# Altium PCB msp430_v4.2_name.PcbDoc (part 1 of 2)
Units mil, origin at the board's own origin, x right, y up, seen from the top; angles counter-clockwise.
Board outline 6102.36 x 4921.26 mil, 2 copper layers (Top Layer, Bottom Layer); 157 components, 141 nets, 553 pads, 72 vias.
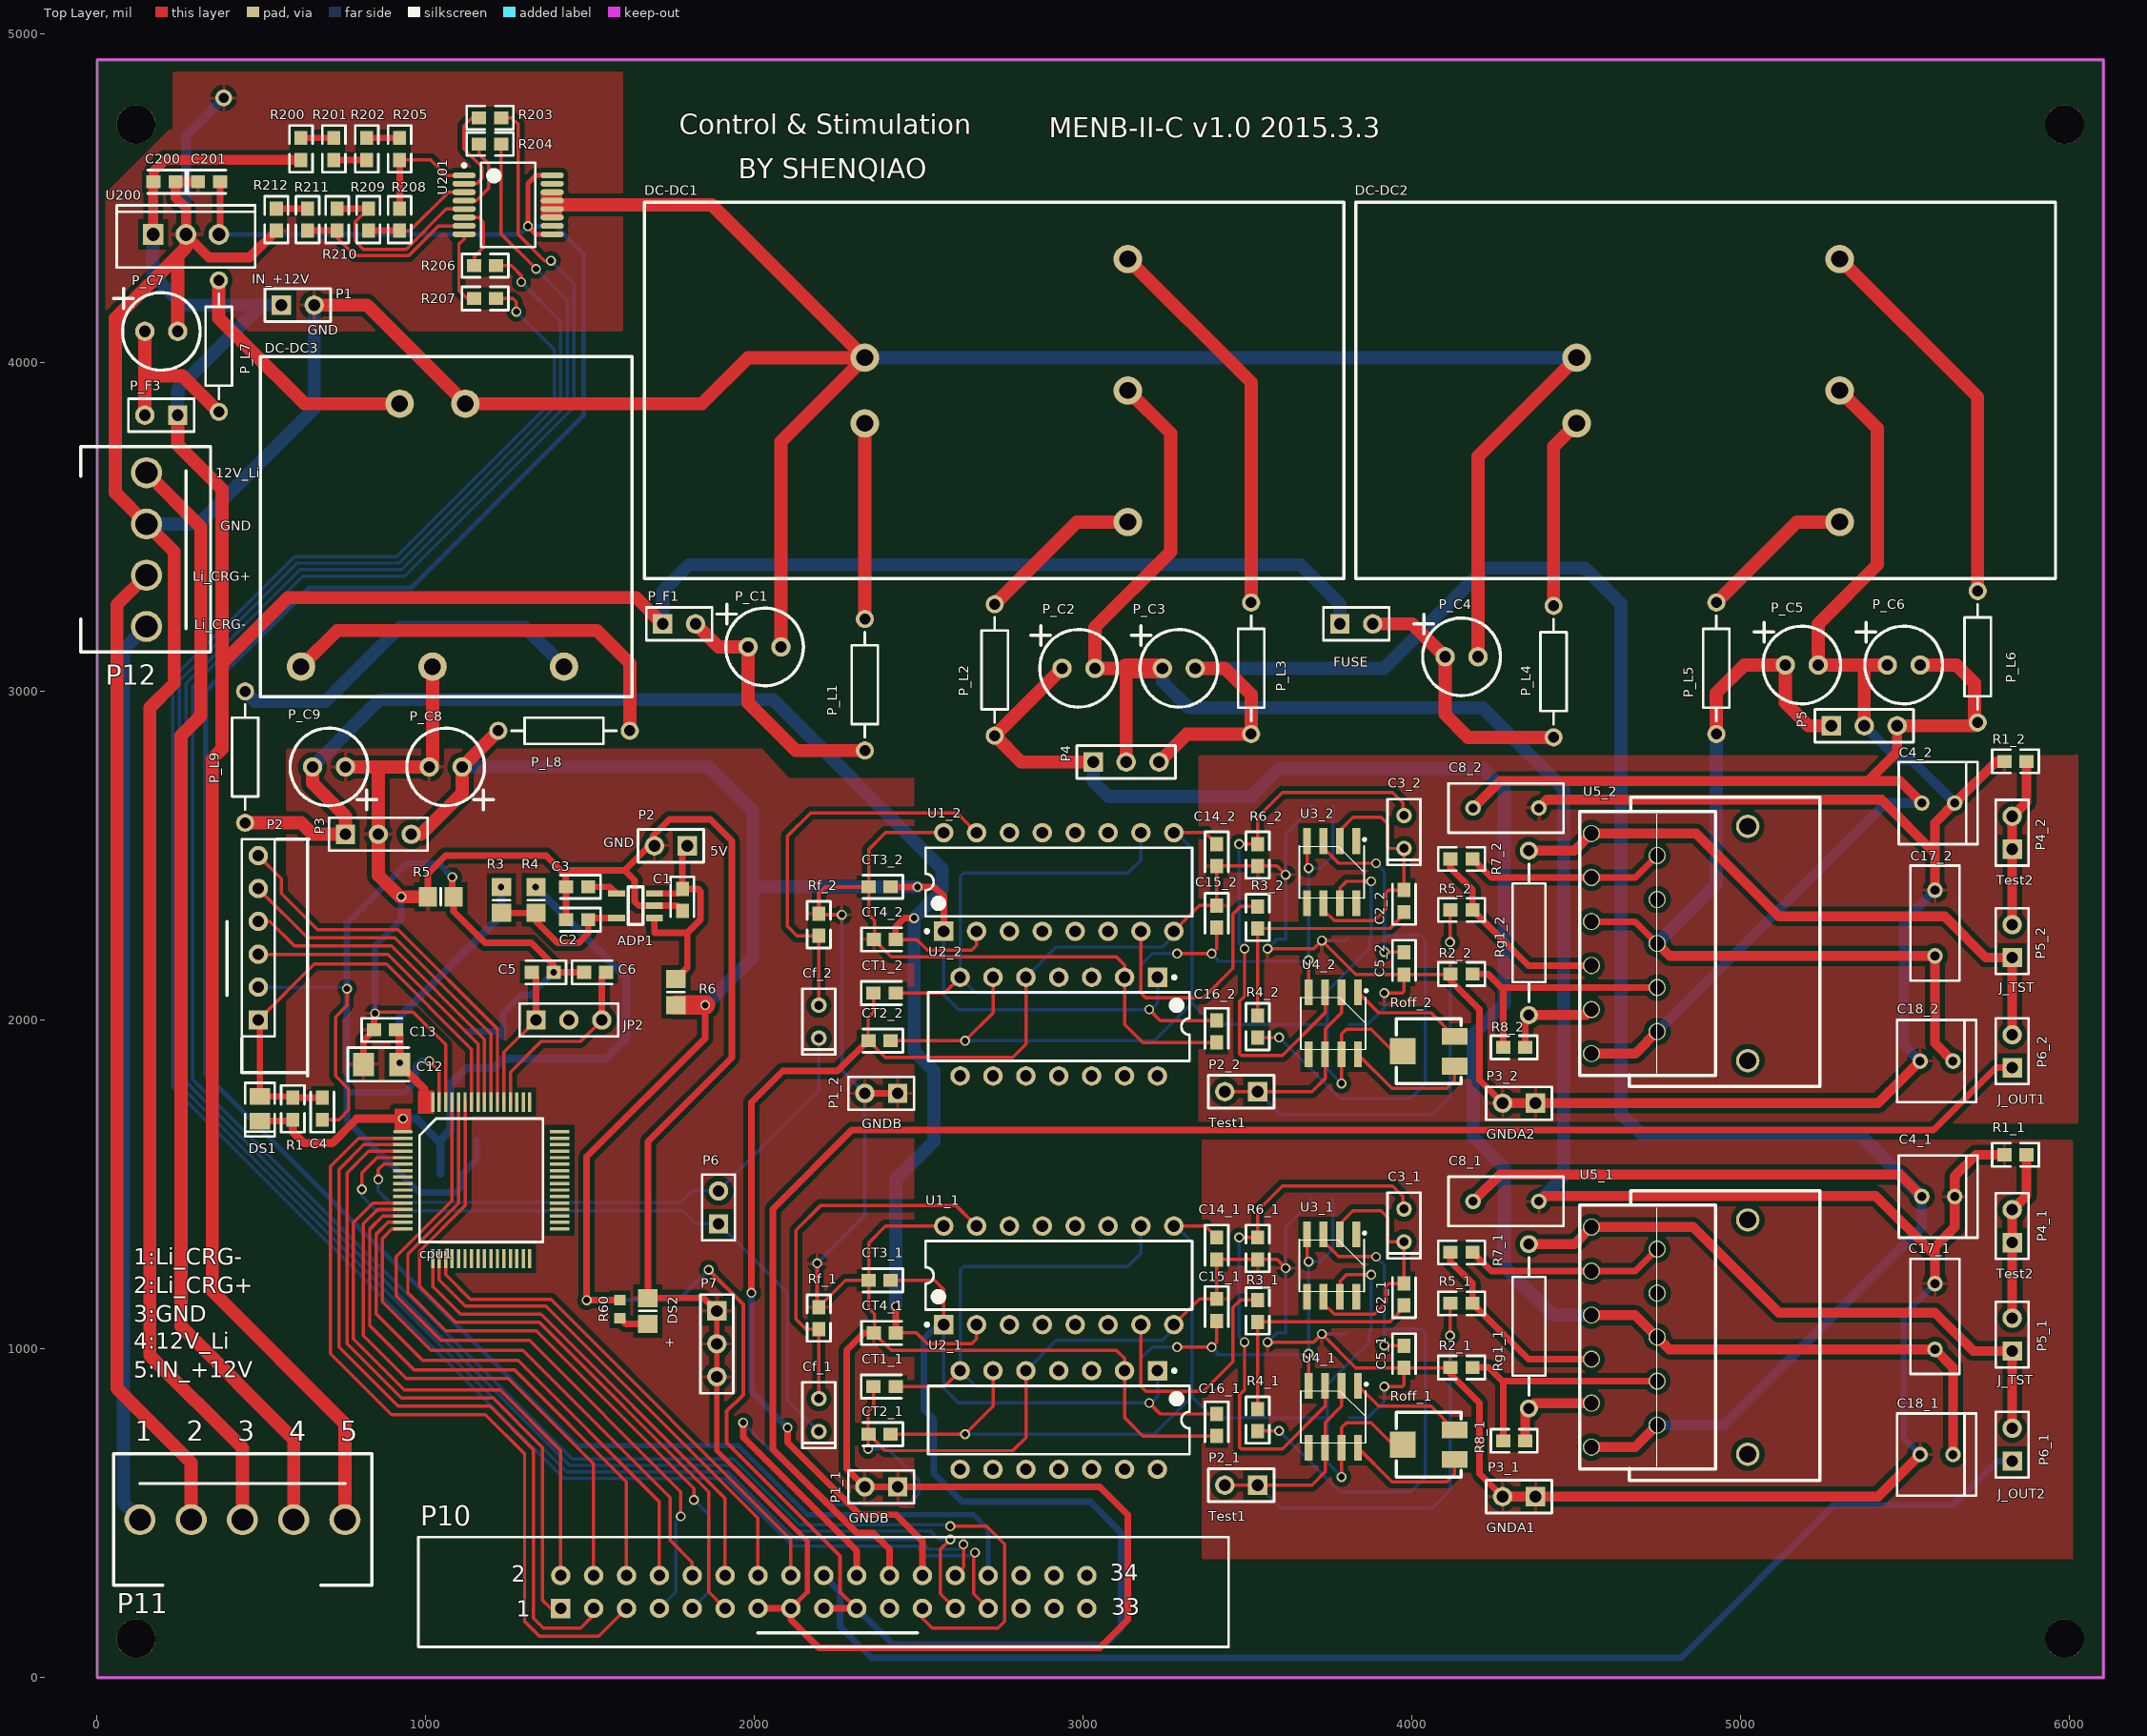
[diagram p0: Top Layer view]
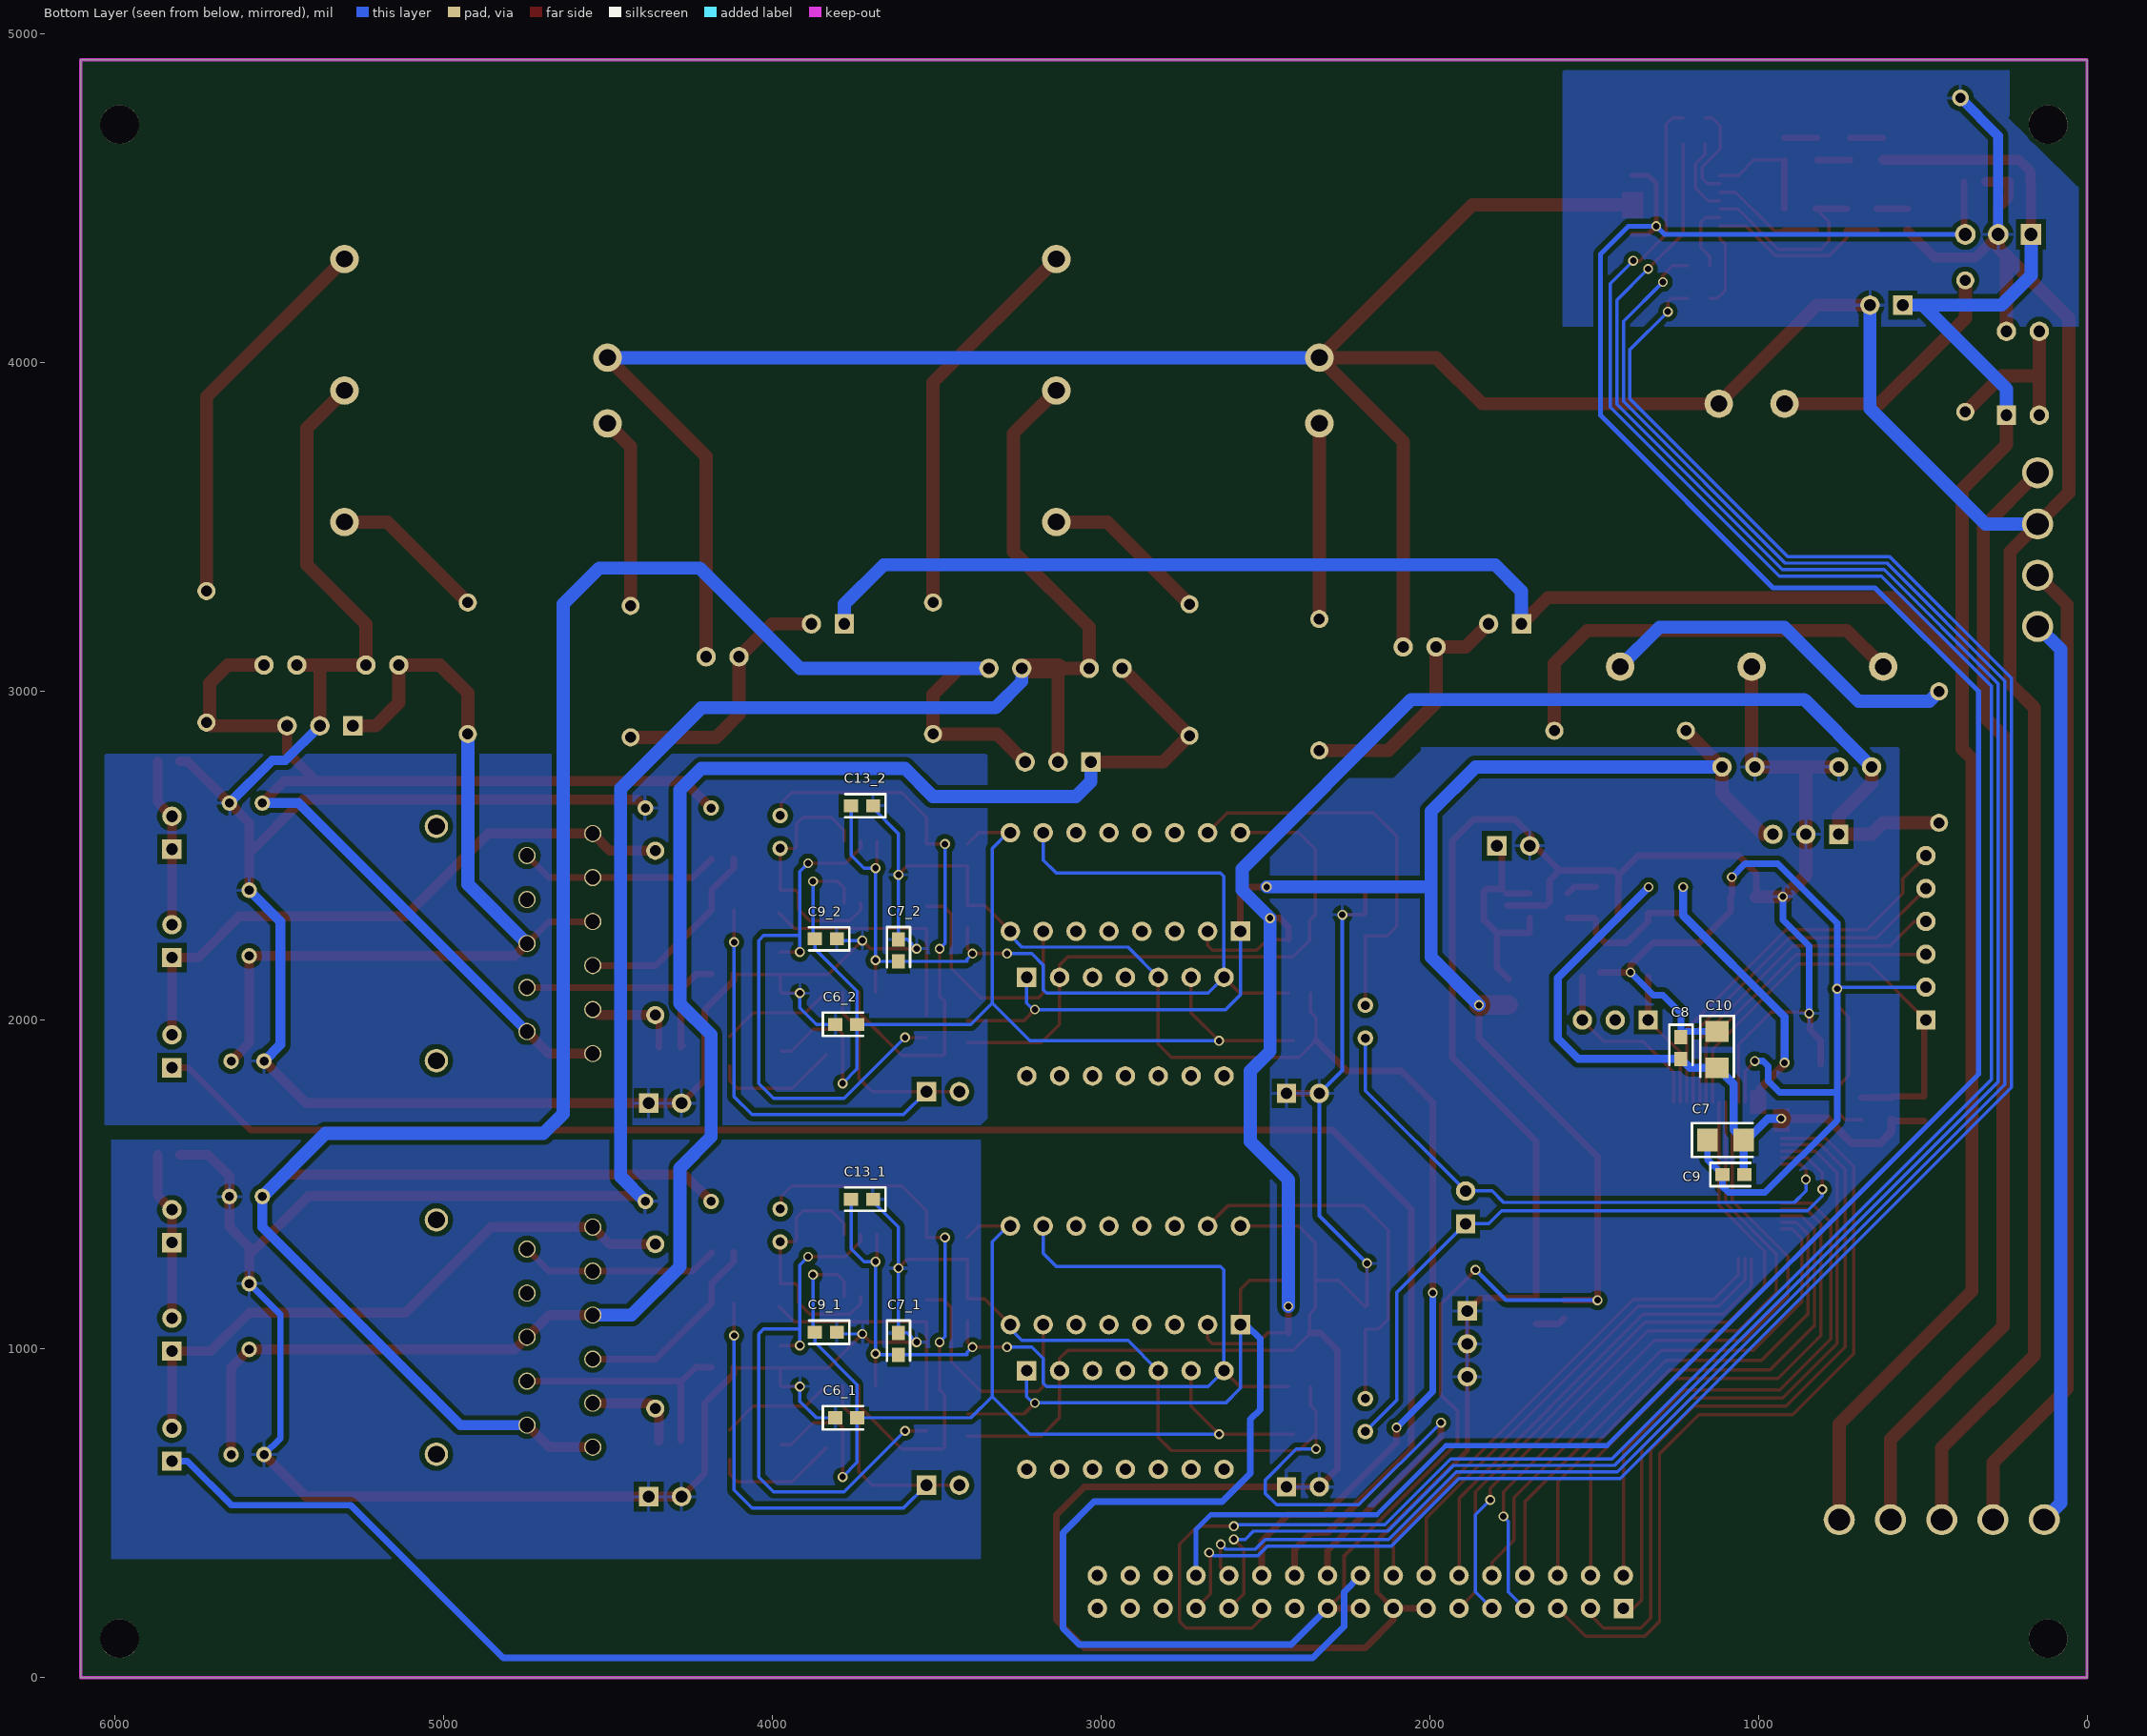
[diagram p1: Bottom Layer view, seen from below]

## Layer stack, top to bottom
Top Layer: signal copper 1.4
Dielectric: dielectric 12.6, FR-4, Dk 4.8
Bottom Layer: signal copper 1.4

## Board outline
0,0 0,4921.26 6102.36,4921.26 6102.36,0

## Design rules (kind name [scope] priority, off if disabled: settings)
Clearance [All] p1: gap=6
ComponentClearance [All] p1 off: gap=2 collisioncheckmode=3 verticalgap=2 showdistances=FALSE
FabricationTestPointUsage TestPointUsage [All] p1: valid=0 allowmultiple=FALSE
FabricationTestpoint Testpoint [All] p1: side=3 testpointundercomponent=TRUE minsize=40 maxsize=100 preferedsize=60 minholesize=0 maxholesize=40 preferedholesize=32 testpointgrid=1 allowsidetop=TRUE allowsidebottom=TRUE usegrid=TRUE gridtolerance=0.01
HoleSize [All] p1: absolutevalues=TRUE maxlimit=500 minlimit=0 maxpercent=80.000 minpercent=20.000
HoleToHoleClearance [All] p1: gap=1 allowstackedmicrovias=TRUE
MinimumSolderMaskSliver [All] p1: minsoldermaskwidth=0
PolygonConnect [All] p1: connectstyle=Relief reliefconductorwidth=10 reliefentries=4 polygonreliefangle="90 Angle"
RoutingVias [All] p1: holewidth=20 width=30 viastyle="Through Hole" minholewidth=8 minwidth=20 maxholewidth=48 maxwidth=50
SilkToSilkClearance [All] p1: silktosilkclearance=0
SilkscreenOverComponentPads [All] p1: minsilkscreentomaskgap=0
SolderMaskExpansion [All] p1: expansion=4
Width Width_VEE [InNetClass('VEE[1..2]')] p1: maxlimit=100 minlimit=20 preferedwidth=30
Width Width_VCC [InNetClass('VCC[1..2]')] p2: maxlimit=100 minlimit=20 preferedwidth=30
Width Width_GNDA [InNetClass('GNDA[1..2]')] p3: maxlimit=100 minlimit=10 preferedwidth=30
Width Width_ALL [All] p4: maxlimit=100 minlimit=5 preferedwidth=10 minimp=50.000000 maximp=50.000000 favimp=50.000000
20 further rules are at their usual default settings.

## Classes and differential pairs
net class VEE[1..2]: VEE1 VEE2
net class VCC[1..2]: VCC1 VCC2
net class SIG_IN[1..2]: SIG_IN1 SIG_IN2
net class GNDA[1..2]: GNDA1 GNDA2
component class 输出板: P5 P6 P10 P11 P12
component class U_ADC_USB: ADP1 bead C1 C2 C3 C4 C5 C6 C7 C8 C9 C10 C12 C13 cpu1 DS1 DS2 JP2 P2 P6 P7 P10 R1 R3 R4 R5 R6 R60
channel class 单通道刺激输出: singleCH1 singleCH2
net class OUT[1..2]: OUT1 OUT2
component class singleCH1: C2_1 C3_1 C4_1 C5_1 C6_1 C7_1 C8_1 C9_1 C13_1 C14_1 C15_1 C16_1 C17_1 C18_1 Cf_1 CT1_1 CT2_1 CT3_1 CT4_1 GNDB P1_1 P2_1 P3_1 P4_1 P5_1 P6_1 R1_1 R2_1 R3_1 R4_1 R5_1 R6_1 R7_1 R8_1 Rf_1 Rg1_1 Roff_1 U1_2 U2_2 U3_2 U4_2
component class singleCH2: C2_2 C3_2 C4_2 C5_2 C6_2 C7_2 C8_2 C9_2 C13_2 C14_1 C15_2 C16_2 C17_2 C18_2 Cf_2 CT1_2 CT2_2 CT3_2 CT4_2 P1_1 P2_2 P3_2 P4_2 P5_2 P6_2 R1_2 R2_2 R3_2 R4_2 R5_2 R6_2 R7_2 R8_2 Rf_2 Rg1_2 Roff_2 U1_2 U2_2 U3_2 U4_2
component class U_电源35: 12-34V 33uH DC-DC1 DC-DC2 DC-DC3 FUSE P_C1 P_C2 P_C3 P_C4 P_C5 P_C6 P_C7 P_C8 P_C9 P_F1 P_F3 P_L1 P_L2 P_L3 P_L4 P_L5 P_L6 P_L7 P_L8 P_L9
component class U_Li_Monitor: C200 C201 R200 R201 R202 R203 R204 R205 R206 R207 R208 R209 R210 R211 R212 U1_2 U2_2

## Components (designator, comment, footprint, x,y, rotation, side; value= is the part's Value field where it differs from the comment)
ADP1 "ADP1711" ADP1711_3v3 -28325,32510.2 r90 top
C1 "1u" CC1608-0603 1780,2365.2 r270 top
C2 "1u" CC1608-0603 1460,2305.2 r180 top
C2_1 "1000p" cap0603 3975,1165 r90 top (schematic designator C2)
C2_2 "1000p" cap0603 3975,2361.93 r90 top (schematic designator C2)
C3 "10n" CC1608-0603 1460,2405.2 r180 top
C3_1 "2.2u" TAN_CAP-A 3975,1375 r90 top (schematic designator C3)
C3_2 "2.2u" TAN_CAP-A 3975,2571.93 r90 top (schematic designator C3)
C4 "0.1uF" CC1608-0603 685,1730 r90 top
C4_1 "10u" TAN_CAP-B 5600,1463.07 r180 top (schematic designator C4)
C4_2 "10u" TAN_CAP-B 5600,2660 r180 top (schematic designator C4)
C5 "15p" CC1608-0603 1355,2145 r180 top
C5_1 "220p" cap0603 3975,975 r270 top (schematic designator C5)
C5_2 "220p" cap0603 3975,2171.93 r270 top (schematic designator C5)
C6 "15p" CC1608-0603 1515,2145 r0 top
C6_1 "0.1u" cap0603 3774.31,790 r180 bottom (schematic designator C6)
C6_2 "0.1u" cap0603 3774.31,1986.93 r180 bottom (schematic designator C6)
C7 "10uF" CC3216-1206 1099.29,1635 r180 bottom
C7_1 "0.1u" cap0603 3615,1015 r270 bottom (schematic designator C7)
C7_2 "0.1u" cap0603 3615,2211.93 r270 bottom (schematic designator C7)
C8 "Cap Semi" CC1608-0603 1235,1915 r270 bottom
C8_1 "0.1u" RAD-0.2 4285,1448.07 r180 top (schematic designator C8)
C8_2 "0.1u" RAD-0.2 4285,2645 r180 top (schematic designator C8)
C9 "0.1uF" CC1608-0603 1075,1530 r180 bottom
C9_1 "0.1u" cap0603 3835.68,1050 r0 bottom (schematic designator C9)
C9_2 "0.1u" cap0603 3835.68,2246.93 r0 bottom (schematic designator C9)
C10 "10uF" CC3216-1206 1125,1910 r270 bottom
C12 "10uF" CC3216-1206 865,1865 r0 top
C13 "0.1uF" CC1608-0603 875,1970 r0 top
C13_1 "0.1u" cap0603 3725.68,1455 r0 bottom (schematic designator C13)
C13_2 "0.1u" cap0603 3725.68,2651.93 r0 bottom (schematic designator C13)
C14_1 "2.2u" cap0603 3405,1305 r270 top (schematic designator C14)
C14_2 "2.2u" cap0603 3405,2501.93 r270 top (schematic designator C14)
C15_1 "2.2u" cap0603 3405,1118.07 r270 top (schematic designator C15)
C15_2 "2.2u" cap0603 3405,2315 r270 top (schematic designator C15)
C16_1 "2.2u" cap0603 3405,768.07 r270 top (schematic designator C16)
C16_2 "2.2u" cap0603 3405,1965 r270 top (schematic designator C16)
C17_1 "0.1u" RAD-0.2 5590,1098.07 r270 top (schematic designator C17)
C17_2 "0.1u" RAD-0.2 5590,2295 r270 top (schematic designator C17)
C18_1 "10u" TAN_CAP-B 5595,678.07 r180 top (schematic designator C18)
C18_2 "10u" TAN_CAP-B 5595,1875 r180 top (schematic designator C18)
C200 "0.1u" cap0603 205,4550 r180 top
C201 "0.33u" cap0603 340,4550 r0 top
Cf_1 "2.2u" TAN_CAP-A 2195,798.07 r90 top (schematic designator Cf)
Cf_2 "2.2u" TAN_CAP-A 2195,1995 r90 top (schematic designator Cf)
cpu1 "MSP430F169" msp430f149 930,1660 r0 top
CT1_1 "1u" cap0603 2395,885 r0 top (schematic designator CT1)
CT1_2 "1u" cap0603 2395,2081.93 r0 top (schematic designator CT1)
CT2_1 "1u" cap0603 2380,740 r180 top (schematic designator CT2)
CT2_2 "1u" cap0603 2380,1936.93 r180 top (schematic designator CT2)
CT3_1 "1u" cap0603 2380,1208.07 r180 top (schematic designator CT3)
CT3_2 "1u" cap0603 2380,2405 r180 top (schematic designator CT3)
CT4_1 "1u" cap0603 2395.69,1048.07 r0 top (schematic designator CT4)
CT4_2 "1u" cap0603 2395.69,2245 r0 top (schematic designator CT4)
DC-DC1 "12-34" 12-35 2335,4015 r0 top
DC-DC2 "12-34" 12-35 4500,4015 r0 top
DC-DC3 "12-5" 12-5 1120,3875 r270 top
DS1 "LED" "SMD _LED" 495,1730 r90 top
DS2 "LED" 6-0805_M 1675,1115 r90 top (schematic designator LED10)
FUSE "Fuse" HDR1X2 3780,3205 r0 top (schematic designator P_F2)
JP2 "8M" HDR1X3 1335,2000 r0 top
P1 "Header 2" HDR1X2 560,4175 r0 top (schematic designator DC12V_IN)
P1_1 "GNDB" HDR1X2 2435,580 r180 top (schematic designator GNDB1)
P1_2 "GNDB" HDR1X2 2435,1776.93 r180 top (schematic designator GNDB1)
P2 "Header 2" HDR1X2 1795,2530 r180 top
P2 "Header 6" HDR1X6 490,2000 r90 top (schematic designator JP1)
P2_1 "Test1" HDR1X2 3530,585 r180 top (schematic designator TEST1)
P2_2 "Test1" HDR1X2 3530,1781.93 r180 top (schematic designator TEST1)
P3 "POWER_5" HDR1X3 755,2565 r0 top (schematic designator V_1)
P3_1 "GNDA1" HDR1X2 4375,550 r180 top (schematic designator GNDA1)
P3_2 "GNDA2" HDR1X2 4375,1746.93 r180 top (schematic designator GNDA1)
P4 "POWERA1" HDR1X3 3030,2785 r0 top (schematic designator POWER1)
P4_1 "Test2" HDR1X2 5825,1323.07 r90 top (schematic designator Test2)
P4_2 "Test2" HDR1X2 5825,2520 r90 top (schematic designator Test2)
P5 "POWERA2" HDR1X3 5275,2895 r0 top (schematic designator POWER2)
P5_1 "J_TST" HDR1X2 5825,993.07 r90 top (schematic designator Jumper1)
P5_2 "J_TST" HDR1X2 5825,2190 r90 top (schematic designator Jumper1)
P6 "Header 2" HDR1X2 1890,1380 r90 top (schematic designator P3)
P6_1 "J_OUT2" HDR1X2 5825,658.07 r90 top (schematic designator Jumper2)
P6_2 "J_OUT1" HDR1X2 5825,1855 r90 top (schematic designator Jumper2)
P7 "Header 3" HDR1X3 1885,1115 r270 top (schematic designator JP6)
P10 "Header 17X2" HDR2X17-NIUJIAO 1410,210 r0 top (schematic designator P?)
P11 "Header 5" POWER-5P 130,480 r0 top (schematic designator P5)
P12 "Header 4" POWER-4P 150,3665 r270 top (schematic designator P4)
P_C1 "10uF/16V" cap_2.54 2030,3135 r0 top
P_C2 "10uF/50V" cap_2.54 2985,3070 r0 top
P_C3 "10uF/50V" cap_2.54 3290,3070 r0 top
P_C4 "10uF/16V" cap_2.54 4150,3105 r0 top
P_C5 "10uF/50V" cap_2.54 5185,3080 r0 top
P_C6 "10uF/50V" cap_2.54 5495,3080 r0 top
P_C7 "10uF/16V" cap_2.54 195,4095 r0 top
P_C8 "10uF/50V" cap_2.54 1060,2770 r180 top
P_C9 "10uF/16V" cap_2.54 705,2770 r180 top
P_F1 "Fuse" HDR1X2 1720,3205 r0 top
P_F3 "Fuse" HDR1X2 245,3840 r180 top
P_L1 "33uH" AXIAL-0.4 2335,3020 r90 top
P_L2 "33uH" AXIAL-0.4 2730,3065 r270 top
P_L3 "33uH" AXIAL-0.4 3510,3070 r270 top
P_L4 "33uH" AXIAL-0.4 4430,3060 r90 top
P_L5 "33uH" AXIAL-0.4 4925,3070 r270 top
P_L6 "33uH" AXIAL-0.4 5720,3105 r270 top
P_L7 "33uH" AXIAL-0.4 370,4050 r90 top
P_L8 "33uH" AXIAL-0.4 1420,2880 r180 top
P_L9 "33uH" AXIAL-0.4 450,2800 r270 top
R1 "100K" C1608-0603 595,1730 r270 top
R1_1 "100" RES0603 5835,1590 r180 top (schematic designator R1)
R1_2 "100" RES0603 5835,2786.93 r180 top (schematic designator R1)
R2_1 "10k" RES0603 4150,943.07 r0 top (schematic designator R2)
R2_2 "10k" RES0603 4150,2140 r0 top (schematic designator R2)
R3 "1" 6-0805_M 1230,2365 r270 top
R3_1 "4.75k" RES0603 3530,1115 r270 top (schematic designator R3)
R3_2 "4.75k" RES0603 3530,2311.93 r270 top (schematic designator R3)
R4 "1" 6-0805_M 1335,2365 r270 top
R4_1 "9.76k" RES0603 3530,783.07 r270 top (schematic designator R4)
R4_2 "9.76k" RES0603 3530,1980 r270 top (schematic designator R4)
R5 "Bead" 6-0805_M 1045,2375 r180 top
R5_1 "10k" RES0603 4150,1138.07 r0 top (schematic designator R5)
R5_2 "10k" RES0603 4150,2335 r0 top (schematic designator R5)
R6 "Bead" 6-0805_M 1760,2085 r270 top
R6_1 "470k" RES0603 3530,1305 r90 top (schematic designator R6)
R6_2 "470k" RES0603 3530,2501.93 r90 top (schematic designator R6)
R7_1 "10k" RES0603 4150,1293.07 r0 top (schematic designator R7)
R7_2 "10k" RES0603 4150,2490 r0 top (schematic designator R7)
R8_1 "10k" RES0603 4310,720 r180 top (schematic designator R8)
R8_2 "10k" RES0603 4310,1916.93 r180 top (schematic designator R8)
R60 "2K" 1608[0603] 1590,1120 r90 top
R200 "36k" RES0603 620,4650 r270 top
R201 "10k" RES0603 720,4650 r90 top
R202 "10k" RES0603 820,4650 r270 top
R203 "2k" RES0603 1195,4745 r0 top
R204 "2k" RES0603 1195,4665 r0 top
R205 "36k" RES0603 920,4650 r90 top
R206 "2k" RES0603 1180,4295 r0 top
R207 "2k" RES0603 1180,4195 r0 top
R208 "1.8k" RES0603 920,4435 r90 top
R209 "1.5k" RES0603 825,4435 r270 top
R210 "750R" RES0603 730,4435 r90 top
R211 "10k" RES0603 640,4435 r270 top
R212 "750R" RES0603 545,4435 r90 top
Rf_1 "470k" RES0603 2195,1093.07 r270 top (schematic designator Rf)
Rf_2 "470k" RES0603 2195,2290 r270 top (schematic designator Rf)
Rg1_1 "100" AXIAL-0.5 4355,1068.07 r90 top (schematic designator Rg1)
Rg1_2 "100" AXIAL-0.5 4355,2265 r90 top (schematic designator Rg1)
Roff_1 "RPot" POT4MM-2 4050,708.07 r180 top (schematic designator Roff)
Roff_2 "RPot" POT4MM-2 4050,1905 r180 top (schematic designator Roff)
U1_1 "ISO124" DIP-16 2925,1223.07 r90 top (schematic designator ISO124)
U1_2 "ISO124" DIP-16 2925,2420 r90 top (schematic designator ISO124)
U2_1 "DCP010505DB" DIP-14 2925,783.07 r270 top (schematic designator DCP1)
U2_2 "DCP010505DB" DIP-14 2925,1980 r270 top (schematic designator DCP1)
U3_1 "OPA227" OPA227(D) 3755,1263.07 r270 top (schematic designator OPA227_2)
U3_2 "OPA227" OPA227(D) 3755,2460 r270 top (schematic designator OPA227_2)
U4_1 "OP27GS" OPA227(D) 3760,803.07 r270 top (schematic designator OP27)
U4_2 "OP27GS" OPA227(D) 3760,2000 r270 top (schematic designator OP27)
U5_1 "OPA2544" OPA2544-SANRE 4745,1035 r270 top (schematic designator OPA2544)
U5_2 "OPA2544" OPA2544-SANRE 4745,2232.33 r270 top (schematic designator OPA2544)
U200 "L7805" TO-220-AB 270,4390 r0 top
U201 "CN1185" SSOP16_L 1250,4480 r0 top

## Footprints (in the part's own frame and the unit in brackets; to place one, negate y for a bottom-side part, rotate by r counter-clockwise, add the part's x,y. Pads: shape width x height; smd on the part's side, far side on the other; paste and mask are expansions set on the pad)
6-0805_M [mm] "Chip Resistor, Body 2.0x1.2mm, IPC Low Density"
  rect 1.4x1.5 smd: 1(-1,0) 2(1,0)
  silkscreen extent 0,-0.65 0,0.65, body extent -1.07,-0.7 1.07,0.7, height 0.7
12-5 [mm]
  round 2.2 hole 1.3: 1(0,-5.08) 2(0,0) 3(20.32,7.62) 4(20.32,-2.54) 5(20.32,-12.7)
  silkscreen extent -3.63,-15.82 22.66,12.88
12-35 [mm]
  round 2.2 hole 1.3: 1(0,0) 2(0,-5.08) 3(20.32,7.62) 4(20.32,-2.54) 5(20.32,-12.7)
  silkscreen extent -17.04,-17.08 37,12
1608[0603] [mm] "Chip Capacitor, Body 1.6x0.8mm, IPC High Density"
  rect 0.8x0.9 smd: 1(-0.7,0) 2(0.7,0)
  body extent -0.87,-0.48 0.87,0.48, height 1.3
ADP1711_3v3 [mm]
  rect 0.5x1.3 smd: 1(-767.08,-762.508) 2(-766.13,-762.508) 3(-765.18,-762.508) 4(-765.18,-759.587) 5(-767.08,-759.587)
  silkscreen extent -767.59,-761.62 -764.67,-760.48
AXIAL-0.4 [mm]
  round 1.4 hole 0.85: 1(-5.08,0) 2(5.08,0)
  silkscreen extent -4.06,-1.02 4.06,1.02
AXIAL-0.5 [mm]
  round 1.4 hole 0.85: 1(-6.35,0) 2(6.35,0)
  silkscreen extent -5.33,-1.27 5.33,1.27
C1608-0603 [mm]
  rect 1.1x1 smd: 1(-0.85,0) 2(0.85,0)
  silkscreen extent -1.8,-0.9 1.8,0.9
cap0603 [mm]
  rect 1.1x1 smd: 1(-0.85,0) 2(0.85,0)
  silkscreen extent -1.8,-0.9 1.3,0.9
cap_2.54 [mm]
  round 1.5 hole 0.9: 1(-1.27,0) 2(1.27,0)
  silkscreen extent -3.68,-3 3,3.3
CC1608-0603 [mm]
  rect 1.1x1 smd: 1(-0.85,0) 2(0.85,0)
  silkscreen extent -1.8,-0.9 1.3,0.9
CC3216-1206 [mm]
  rect 1.6x1.8 smd: 1(-1.4,0) 2(1.4,0)
  silkscreen extent -2.6,-1.3 2.1,1.3
DIP-14 [mm]
  rect 1.5x1.5 hole 0.9: 1(-3.81,7.62)
  round 1.5 hole 0.9: 2(-3.81,5.08) 3(-3.81,2.54) 4(-3.81,0) 5(-3.81,-2.54) 6(-3.81,-5.08) 7(-3.81,-7.62) 8(3.81,-7.62) 9(3.81,-5.08) 10(3.81,-2.54) 11(3.81,0) 12(3.81,2.54) 13(3.81,5.08) 14(3.81,7.62)
  silkscreen extent -3.93,-10.1 2.65,10.1, body extent -3.6,-10.1 3.6,10.1, height 5.08
DIP-16 [mm]
  rect 1.5x1.5 hole 0.9: 1(-3.81,8.89)
  round 1.5 hole 0.9: 2(-3.81,6.35) 3(-3.81,3.81) 4(-3.81,1.27) 5(-3.81,-1.27) 6(-3.81,-3.81) 7(-3.81,-6.35) 8(-3.81,-8.89) 9(3.81,-8.89) 10(3.81,-6.35) 11(3.81,-3.81) 12(3.81,-1.27) 13(3.81,1.27) 14(3.81,3.81) 15(3.81,6.35) 16(3.81,8.89)
  silkscreen extent -3.93,-10.3 2.65,10.31, body extent -3.6,-10.28 3.6,10.28, height 5.08
HDR1X2 [mm]
  rect 1.5x1.5 hole 0.9: 1(0,0)
  round 1.5 hole 0.9: 2(2.54,0)
  silkscreen extent -1.27,-1.27 3.81,1.27
HDR1X3 [mm] "Connector; Header; 3 Position"
  rect 1.5x1.5 hole 0.9: 1(0,0)
  round 1.5 hole 0.9: 2(2.54,0) 3(5.08,0)
  silkscreen extent -1.27,-1.27 6.35,1.27
HDR1X6 [mm] "Connector; Header; 6 Position"
  rect 1.5x1.5 hole 0.9: 1(0,0)
  round 1.5 hole 0.9: 2(2.54,0) 3(5.08,0) 4(7.62,0) 5(10.16,0) 6(12.7,0)
  silkscreen extent -1.27,-1.27 13.97,1.27
HDR2X17-NIUJIAO [mm]
  rect 1.5x1.5 hole 0.9: 1(0,0)
  round 1.5 hole 0.9: 2(0,2.54) 3(2.54,0) 4(2.54,2.54) 5(5.08,0) 6(5.08,2.54) 7(7.62,0) 8(7.62,2.54) 9(10.16,0) 10(10.16,2.54) 11(12.7,0) 12(12.7,2.54) 13(15.24,0) 14(15.24,2.54) 15(17.78,0) 16(17.78,2.54) 17(20.32,0) 18(20.32,2.54) 19(22.86,0) 20(22.86,2.54) 21(25.4,0) 22(25.4,2.54) 23(27.94,0) 24(27.94,2.54) 25(30.48,0) 26(30.48,2.54) 27(33.02,0) 28(33.02,2.54) 29(35.56,0) 30(35.56,2.54) 31(38.1,0) 32(38.1,2.54) 33(40.64,0) 34(40.64,2.54)
  silkscreen extent -11,-2.98 51.6,5.52
msp430f149 [mm]
  oval 1.5x0.25 smd: 1(0,0)
  rect 1.5x0.25 smd: 2(0,-0.5) 3(0,-1) 4(0,-1.5) 5(0,-2) 6(0,-2.5) 7(0,-3) 8(0,-3.5) 9(0,-4) 10(0,-4.5) 11(0,-5) 12(0,-5.5) 13(0,-6) 14(0,-6.5) 15(0,-7) 16(0,-7.5) 33(12.1,-7.5) 34(12.1,-7) 35(12.1,-6.5) 36(12.1,-6) 37(12.1,-5.5) 38(12.1,-5) 39(12.1,-4.5) 40(12.1,-4) 41(12.1,-3.5) 42(12.1,-3) 43(12.1,-2.5) 44(12.1,-2) 45(12.1,-1.5) 46(12.1,-1) 47(12.1,-0.5) 48(12.1,0)
  rect 0.25x1.5 smd: 17(2.3,-9.8) 18(2.8,-9.8) 19(3.3,-9.8) 20(3.8,-9.8) 21(4.3,-9.8) 22(4.8,-9.8) 23(5.3,-9.8) 24(5.8,-9.8) 25(6.3,-9.8) 26(6.8,-9.8) 27(7.3,-9.8) 28(7.8,-9.8) 29(8.3,-9.8) 30(8.8,-9.8) 31(9.3,-9.8) 32(9.8,-9.8) 49(9.8,2.3) 50(9.3,2.3) 51(8.8,2.3) 52(8.3,2.3) 53(7.8,2.3) 54(7.3,2.3) 55(6.8,2.3) 56(6.3,2.3) 57(5.8,2.3) 58(5.3,2.3) 59(4.8,2.3) 60(4.3,2.3) 61(3.8,2.3) 62(3.3,2.3) 63(2.8,2.3) 64(2.3,2.3)
  silkscreen extent 1.28,-8.51 10.81,1.02
OPA227(D) [mm]
  rect 2x0.6 smd paste-0.025 mask+0: 1(-2.146,1.905) 2(-2.146,0.635) 3(-2.146,-0.635) 4(-2.146,-1.905) 5(2.654,-1.905) 6(2.654,-0.635) 7(2.654,0.635) 8(2.654,1.905)
  silkscreen extent -2.36,-2.5 2.25,2.64
OPA2544-SANRE [mil]
  round 52.4 hole 44.5: 1(-335,-200) 2(-268.1,0) 3(-201.1,-200) 4(-134.2,0) 5(-67.3,-200) 6(-0.4,0) 7(66.6,-200) 8(133.5,0) 9(200.4,-200) 10(267.4,0) 11(334.3,-200)
  round 70.87 hole 51.18: ""(-356.69,275.59) ""(355.91,275.59)
  silkscreen extent -445,-235 435,495
POT4MM-2 [mm]
  rect 2x1.3 smd: CCW(-2,-1.15) CW(-2,1.15)
  rect 2x2 smd: W(2,0)
  silkscreen extent -2.5,-2.5 2.5,2.5
POWER-4P [mm]
  round 2.4 hole 1.7: 1(0,0) 2(3.96,0) 3(7.92,0) 4(11.88,0)
  silkscreen extent -2.03,-5.08 13.84,4.95
POWER-5P [mm]
  round 2.4 hole 1.7: 1(0,0) 2(3.96,0) 3(7.92,0) 4(11.88,0) 5(15.84,0)
  silkscreen extent -2.03,-5.08 17.91,5.08
RAD-0.2 [mm]
  round 1.2 hole 0.7: 1(-2.54,0) 2(2.54,0)
  silkscreen extent -4.44,-1.91 4.44,1.91
RES0603 [mm]
  rect 1.1x1 smd: 1(-0.85,0) 2(0.85,0)
  silkscreen extent -1.8,-0.9 1.8,0.9
"SMD _LED" [mm]
  rect 1.3x1.6 smd: 1(0.95,0) 2(-0.95,0)
  silkscreen extent -2.13,-1.15 2,1.15
SSOP16_L [mm]
  oval 1.8x0.45 smd: 1(-3.4,2.275) 2(-3.4,1.625) 3(-3.4,0.975) 4(-3.4,0.325) 5(-3.4,-0.325) 6(-3.4,-0.975) 7(-3.4,-1.625) 8(-3.4,-2.275) 9(3.4,-2.275) 10(3.4,-1.625) 11(3.4,-0.975) 12(3.4,-0.325) 13(3.4,0.325) 14(3.4,0.975) 15(3.4,1.625) 16(3.4,2.275)
  silkscreen extent -3.52,-3.25 2.1,3.25, body extent -2.7,-3.25 2.7,3.25, height 2
TAN_CAP-A [mm]
  round 1.2 hole 0.7: 1(-1.27,0) 2(1.27,0)
  silkscreen extent -2.54,-1.27 2.54,1.27
TAN_CAP-B [mm]
  round 1.2 hole 0.7: 1(-1.27,0) 2(1.27,0)
  silkscreen extent -3.05,-3.18 3.05,3.18
TO-220-AB [mm]
  rect 1.6x1.6 hole 1: 1(-2.54,0)
  round 1.6 hole 1: 2(0,0) 3(2.54,0)
  silkscreen extent -5.35,-2.55 5.35,2.25

## Part data
ADP1: library part ADP1711_3v3
C1 C2 C3 C4 C5 C6 C7 C9 C10 C12 C13: library part "Cap Semi", "Capacitor (Semiconductor SIM Model)"
C8: "Capacitor (Semiconductor SIM Model)"
cpu1: library part MSP430F149
DS1 DS2: library part LED3, "Typical BLUE SiC LED"
JP2: library part "Header 3", "Header, 3-Pin"
P1 P2 P6: "Header, 2-Pin"
P2: "Header, 6-Pin"
P7: "Header, 3-Pin"
R1 R60: library part Res3, "Resistor"
R3 R4: library part "Res Semi", "Semiconductor Resistor"
R5 R6: library part Res2, "Resistor"

## Free pads (board coordinates)
  round 118.11 hole 118.11: 0(5984.25,118.11) 1(118.11,118.11) 2(5984.25,4724.41) 3(118.11,4724.41)

## Via types
v1: diameter 30, hole 20, Top Layer to Bottom Layer, 71 vias
v2: diameter 50, hole 30, Top Layer to Bottom Layer, 1 vias

## Nets (pads, with @x,y where several pads share a name; then routed paths per layer and width w, separated by ;. In a path a pad name is that pad's centre, name@x,y a point inside that pad or via, vN(x,y) a via of type N, cw(c..) or ccw(c..) an arc to the next point about the centre after c; other vN are vias at no path point)
5V: ADP1.1 ADP1.3 C1.1 P2.1@1795,2530 R6.1 | length 710.4
  Top Layer w20: ADP1.1@1695,2310.2 1695,2265.2 1795,2265.2 ; ADP1.3@1695,2385 C1.1@1766.34,2385 ; R6.1@1760,2124.37 1795,2159.37 1795,2265.2 ; P2.1@1795,2530 1780,2515 C1.1@1780,2398.66 1828.46,2398.66 1835,2392.13 1835,2305.2 1795,2265.2
5V_7805: C201.2 P10.28 U200.3 U201.9 U201.16 | length 7861.7
  Top Layer w15: U201.9@1383.86,4390.43 1334.57,4390.43 v1(1310,4415) 1310,4545 1334.57,4569.57 U201.16@1383.86,4569.57
  Top Layer w20: U200.3@370,4390 373.46,4393.46 C201.2@373.46,4550
  Bottom Layer w15: U200.3@370,4390 1285,4390 v1(1310,4415) 1395,4415 1480,4330 1480,3840 955,3315 645,3315 330,3000 330,1835 1460,705 1950,705 2160,495 2665,495 2710,450 P10.28@2710,310
10: cpu1.12 P10.2 | length 1681.5
  Top Layer w10: cpu1.12@930,1443.47 838.47,1443.47 779,1384 779,1030 934,875 1225,875 1410,690 P10.2@1410,310
11: cpu1.13 P10.4 | length 1679.7
  Top Layer w10: cpu1.13@930,1423.78 853.78,1423.78 810,1380 810,1040 940,910 1250,910 1510,650 P10.4@1510,310
12: cpu1.14 P10.6 | length 1673.8
  Top Layer w10: cpu1.14@930,1404.09 869.09,1404.09 829,1364 829,1071 965,935 1270,935 1610,595 P10.6@1610,310
13: cpu1.15 P10.8 | length 1662
  Top Layer w10: cpu1.15@930,1384.41 884.41,1384.41 848,1348 848,1107 990,965 1280,965 1710,535 P10.8@1710,310
14: cpu1.16 P10.10 | length 1654.9
  Top Layer w10: cpu1.16@930,1364.72 896.72,1364.72 867,1335 867,1143 1015,995 1295,995 1742.5,547.5 1742.5,417.5 1810,350 P10.10@1810,310
15: cpu1.17 P10.12 | length 1476.1
  Top Layer w10: cpu1.17@1020.55,1274.17 1021.24,1273.49 1021.24,1188.76 1105,1105 1350,1105 1910,545 P10.12@1910,310
16: cpu1.18 P10.14 | length 1509.4
  Top Layer w10: cpu1.18@1040.24,1274.17 1040.24,1209.76 1120,1130 1365,1130 2010,485 P10.14@2010,310
17: cpu1.19 P10.16 | length 1542.7
  Top Layer w10: cpu1.19@1059.92,1274.17 1059.92,1225 1134.92,1150 1380,1150 2110,420 P10.16@2110,310
20: cpu1.20
21: cpu1.21
22: cpu1.22
23: cpu1.23
24: cpu1.24
25: cpu1.25
26: cpu1.26
27: cpu1.27
30: cpu1.28
31: cpu1.29
32: cpu1.30
33: cpu1.31
34: cpu1.32
35: cpu1.33
36: cpu1.34
37: cpu1.35
40: cpu1.36
41: cpu1.37
42: cpu1.38
43: cpu1.39
44: cpu1.40
45: cpu1.41
46: cpu1.42
47: cpu1.43
50: cpu1.44
51: cpu1.45
52: cpu1.46
53: cpu1.47
54: cpu1.48
55: cpu1.49
56: cpu1.50
57: cpu1.51
60: cpu1.59 P10.11 | length 2132.7
  Top Layer w10: cpu1.59@1118.98,1750.55 1118.98,1435.24 980,1296.26 980,1190 1090,1080 1345,1080 1860,565 1860,260 P10.11@1910,210
61: cpu1.60 P10.9 | length 2165.3
  Top Layer w10: cpu1.60@1099.29,1750.55 1099.29,1442.42 945,1288.13 945,1170 1060,1055 1335,1055 1815,575 v1(1815,540)
  Bottom Layer w10: P10.9@1810,210 1860,260 1860,495 v1(1815,540)
62: cpu1.61 P10.7 | length 2154.2
  Top Layer w10: cpu1.61@1079.61,1750.55 1079.61,1449.61 910,1280 910,1160 1045,1025 1315,1025 1775,565 v1(1775,490)
  Bottom Layer w10: P10.7@1710,210 1760,260 1760,475 v1(1775,490)
63: cpu1.2 P10.5 | length 2415.5
  Top Layer w10: cpu1.2@930,1640.32 795.32,1640.32 710,1555 710,985 895,800 1180,800 1300,680 1300,170 1345,125 1525,125 P10.5@1610,210
64: cpu1.3 P10.3 | length 2232.6
  Top Layer w10: cpu1.3@930,1620.63 810.63,1620.63 735,1545 735,1005 915,825 1195,825 1327,693 1327,180 1357,150 1470,150 1510,190 P10.3@1510,210
65: cpu1.4 P10.1 | length 1973.1
  Top Layer w10: cpu1.4@930,1600.95 825.95,1600.95 760,1535 760,1015 925,850 1205,850 1355,700 1355,235 1380,210 P10.1@1410,210
A+3.3V: C12.2 C13.2 cpu1.64 R3.1 | length 896.5
  Top Layer w25: C13.2@920.12,1958.35 C12.2@920.12,1865 995,1790.12 995,1755
  Bottom Layer w25: v1(920,1870) 920,2010 1228.46,2318.46 v1(1228.46,2404.37)
D+3.3V: C7.2 C8.2 C9.2 C10.2 cpu1.1 DS1.2 R1.2 R4.1 | length 2106.2
  Top Layer w20: DS1.2@495,1692.6 R1.2@591.06,1692.6
  Top Layer w25: R1.2@595,1696.54 595,1660 630,1625 715,1625 790,1700 v1(930,1700)
  Bottom Layer w25: v1(930,1700) 970,1700 1035,1635 C7.2@1044.17,1635 ; C9.2@1044.17,1532.64 C7.2@1044.17,1635 ; v1(1333.46,2404.37) 1610,2127.83 1610,1945 1546.54,1881.54 C8.2@1235,1881.54 1208.35,1854.88 C10.2@1125,1854.88 1075,1804.88 1075,1665.83 C7.2@1044.17,1635
DGND: C4.1 C5.1 C6.1 C7.1 C8.1 C9.1 C10.1 cpu1.63 P2.2@490,2100 R5.1 | length 3813.9
  Top Layer w10: C4.1@685,1696.54 735,1696.54 765,1726.54 765,1790 725,1830 725,2010 760,2045 v1(760,2095) ; v1(1010,1875) 1040.24,1844.76 cpu1.63@1040.24,1750.55
  Top Layer w20: R5.1@1080,2379.37 v1(1080,2435) ; R5.1@1084.37,2375 1084.37,2330.63 1180,2235 1320,2235 1388.46,2166.54 v1(1388.46,2145) C6.1@1481.54,2145
  Bottom Layer w10: P2.2@490,2100 760,2100 v1(760,2095)
  Bottom Layer w20: v1(760,2095) 760,1780 ; v1@760,2100 760,2295 940,2475 1040,2475 v1(1080,2435) ; v1(1010,1875) 985,1875 970,1860 970,1815 935,1780 760,1780 ; C10.1@1125,1965.12 1218.35,1965.12 C8.1@1235,1948.46 1235,2020 1290,2075 1318.46,2075 v1(1388.46,2145) ; C7.1@1154.41,1635 1154.41,1575.94 C9.1@1108.46,1530 1108.46,1493.46 1090,1475 980,1475 760,1695 760,1780
GND: C200.1 C201.1 DC-DC1.1 DC-DC2.1 DC-DC3.2 P1.2 P11.3 P12.2 P_C1.2 P_C4.2 P_C7.2 R212.1 U200.2 U201.11 U201.12 U201.13 U201.14 | length 13652.3
  Top Layer w30: C201.1@306.54,4550 C200.1@238.46,4550 238.46,4501.54 270,4470 U200.2@270,4390 340,4320 463.46,4320 R212.1@545,4401.54
  Top Layer w40: P_C7.2@245,4095 245,4325 ; U200.2@270,4390 270,4350 245,4325 ; P11.3@441.81,480 441.81,698.19 160,980 160,2950 234.09,3024.09 234.09,3425 P12.2@150,3509.09 55,3604.09 55,4135 245,4325 ; P1.2@660,4175 820,4175 DC-DC3.2@1120,3875 1840,3875 1980,4015 DC-DC1.1@2335,4015 ; 1380,4480 1870,4480 DC-DC1.1@2335,4015 ; P_C1.2@2080,3135 2080,3760 DC-DC1.1@2335,4015 ; P_C4.2@4200,3105 4200,3715 DC-DC2.1@4500,4015
  Bottom Layer w30: U200.2@270,4390 270,4690 v2(385,4805)
  Bottom Layer w40: P12.2@150,3509.09 309.09,3509.09 660,3860 P1.2@660,4175 ; DC-DC1.1@2335,4015 DC-DC2.1@4500,4015
GNDA1: C4_1.1 C5_1.2 C6_1.1 C7_1.1 C8_1.1 C9_1.1 C13_1.1 C14_1.2 C15_1.1 C17_1.1 C18_1.2 CT1_1.1 CT2_1.2 DC-DC1.4 P3_1.1 P3_1.2 P4.2 P10.20 P_C2.2 P_C3.1 R1_1.2 R2_1.1 R6_1.1 U1_1.8 U2_1.5 | length 13249.2
  Top Layer w10: v1@2345,705 CT2_1.2@2345,741.54 ; CT1_1.1@2361.54,885 2361.54,826.54 2345,810 CT2_1.2@2345,741.54 ; U2_1.5@2825,933.07 2825,730 2785,690 2396.54,690 CT2_1.2@2346.54,740 CT2_1.2@2345,741.54 ; U1_1.8@3275,1073.07 3353.46,1151.54 C15_1.1@3405,1151.54 C14_1.2@3405,1271.54 R6_1.1@3530,1271.54 3588.46,1271.54 v1(3615,1245) ; v1(3560,1020) 3700,1020 v1(3725,1045) 3828.46,941.54 C5_1.2@3975,941.54 ; v1(3915,885) 3970,885 3975,890 C5_1.2@3975,941.54 ; R2_1.1@4116.54,943.07 4115,941.54 C5_1.2@3975,941.54
  Top Layer w20: v1(1965,775) 1965,730 2310,385 P10.20@2310,310 ; R2_1.1@4116.54,943.07 4116.54,923.46 4205,835 4205,620 P3_1.2@4275,550
  Top Layer w30: P3_1.2@4275,550 P3_1.1@4375,550 5416.93,550 C18_1.2@5545,678.07 ; C8_1.1@4385,1448.07 4401.93,1465 5410,1465 5590,1285 ; C17_1.1@5590,1198.07 5590,1285 ; R1_1.2@5801.54,1590 5715,1590 5650,1525 C4_1.1@5650,1463.07 5650,1370 5590,1310 5590,1285
  Top Layer w40: P4.2@3130,2785 3130,3070 P_C2.2@3035,3070 3035,3195 3265,3425 3265,3785 DC-DC1.4@3135,3915
  Top Layer w60: 3130,3070 P_C3.1@3240,3070
  Bottom Layer w10: v1(1965,775) 2215,525 2465,525 2500,560 2500,600 2405,695 v1(2345,695) ; U2_1.5@2825,933.07 2916.93,1025 3240,1025 3275,1060 U1_1.8@3275,1073.07 ; v1(3560,1020) 3588.46,1048.46 C7_1.1@3615,1048.46 v1(3615,1245) 3615,1370 3692.22,1447.22 C13_1.1@3692.22,1455 ; v1(3725,1045) 3797.22,1045 C9_1.1@3802.22,1050 ; C6_1.1@3807.78,790 3865,790 3915,840 v1(3915,885)
  Bottom Layer w20: C18_1.2@5545,678.07 5495,728.07 5495,1103.07 C17_1.1@5590,1198.07
  Bottom Layer w40: P_C3.1@3240,3070 3240,3030 3320,2950 4215,2950 4460,2705 4460,1523.07 C8_1.1@4385,1448.07
GNDA2: C4_2.1 C5_2.2 C6_2.1 C7_2.1 C8_2.1 C9_2.1 C13_2.1 C14_2.2 C15_2.1 C17_2.1 C18_2.2 CT1_2.1 CT2_2.2 DC-DC2.4 P3_2.1 P3_2.2 P5.2 P10.24 P_C5.2 P_C6.1 R1_2.2 R2_2.1 R6_2.1 U1_2.8 U2_2.5 | length 11383.1
  Top Layer w10: CT1_2.1@2361.54,2081.93 2361.54,2023.46 2345,2006.93 2345,1938.46 CT2_2.2@2346.54,1936.93 2396.54,1886.93 2785,1886.93 2825,1926.93 U2_2.5@2825,2130 ; U1_2.8@3275,2270 3353.46,2348.46 C15_2.1@3405,2348.46 C14_2.2@3405,2468.46 R6_2.1@3530,2468.46 3588.46,2468.46 v1(3615,2441.93) ; v1(3560,2216.93) 3700,2216.93 v1(3725,2241.93) 3828.46,2138.46 C5_2.2@3975,2138.46 ; v1(3915,2081.93) 3970,2081.93 3975,2086.93 C5_2.2@3975,2138.46 ; R2_2.1@4116.54,2140 4115,2138.46 C5_2.2@3975,2138.46
  Top Layer w20: v1(1990,1170) 1990,1750 2085,1845 2251.54,1845 CT2_2.2@2345,1938.46 ; v1(2100,760) 2100,715 2320,495 2430,495 2510,415 P10.24@2510,310 ; R2_2.1@4116.54,2140 4116.54,2120.39 4205,2031.93 4205,1816.93 P3_2.2@4275,1746.93
  Top Layer w30: P3_2.2@4275,1746.93 P3_2.1@4375,1746.93 5416.93,1746.93 C18_2.2@5545,1875 ; C8_2.1@4385,2645 4410,2670 5426.93,2670 5590,2506.93 ; C17_2.1@5590,2395 5590,2506.93 ; R1_2.2@5801.54,2786.93 5776.93,2786.93 C4_2.1@5650,2660 5590,2600 5590,2506.93
  Top Layer w40: DC-DC2.4@5300,3915 5415,3800 5415,3385 5235,3205 P_C5.2@5235,3080 P_C6.1@5445,3080 ; P5.2@5375,2895 5375,3075
  Bottom Layer w10: U2_2.5@2825,2130 2916.93,2221.93 3240,2221.93 3275,2256.93 U1_2.8@3275,2270 ; v1(3560,2216.93) 3588.46,2245.39 C7_2.1@3615,2245.39 v1(3615,2441.93) 3615,2566.93 3692.22,2644.15 C13_2.1@3692.22,2651.93 ; v1(3725,2241.93) 3797.22,2241.93 C9_2.1@3802.22,2246.93 ; C6_2.1@3807.78,1986.93 3865,1986.93 3915,2036.93 v1(3915,2081.93)
  Bottom Layer w20: v1(1990,1170) 1990,870 v1(2100,760)
  Bottom Layer w30: P5.2@5375,2895 5480,2790 5520,2790 C4_2.1@5650,2660 ; C18_2.2@5545,1875 5495,1925 5495,2300 C17_2.1@5590,2395